# Altium PCB PCB2.pcbdoc
Units mil, origin at the board's own origin, x right, y up, seen from the top; angles counter-clockwise.
Board outline 2704 x 1920 mil, 2 copper layers (Top Layer, Bottom Layer); 35 components, 21 nets, 157 pads, 55 vias.
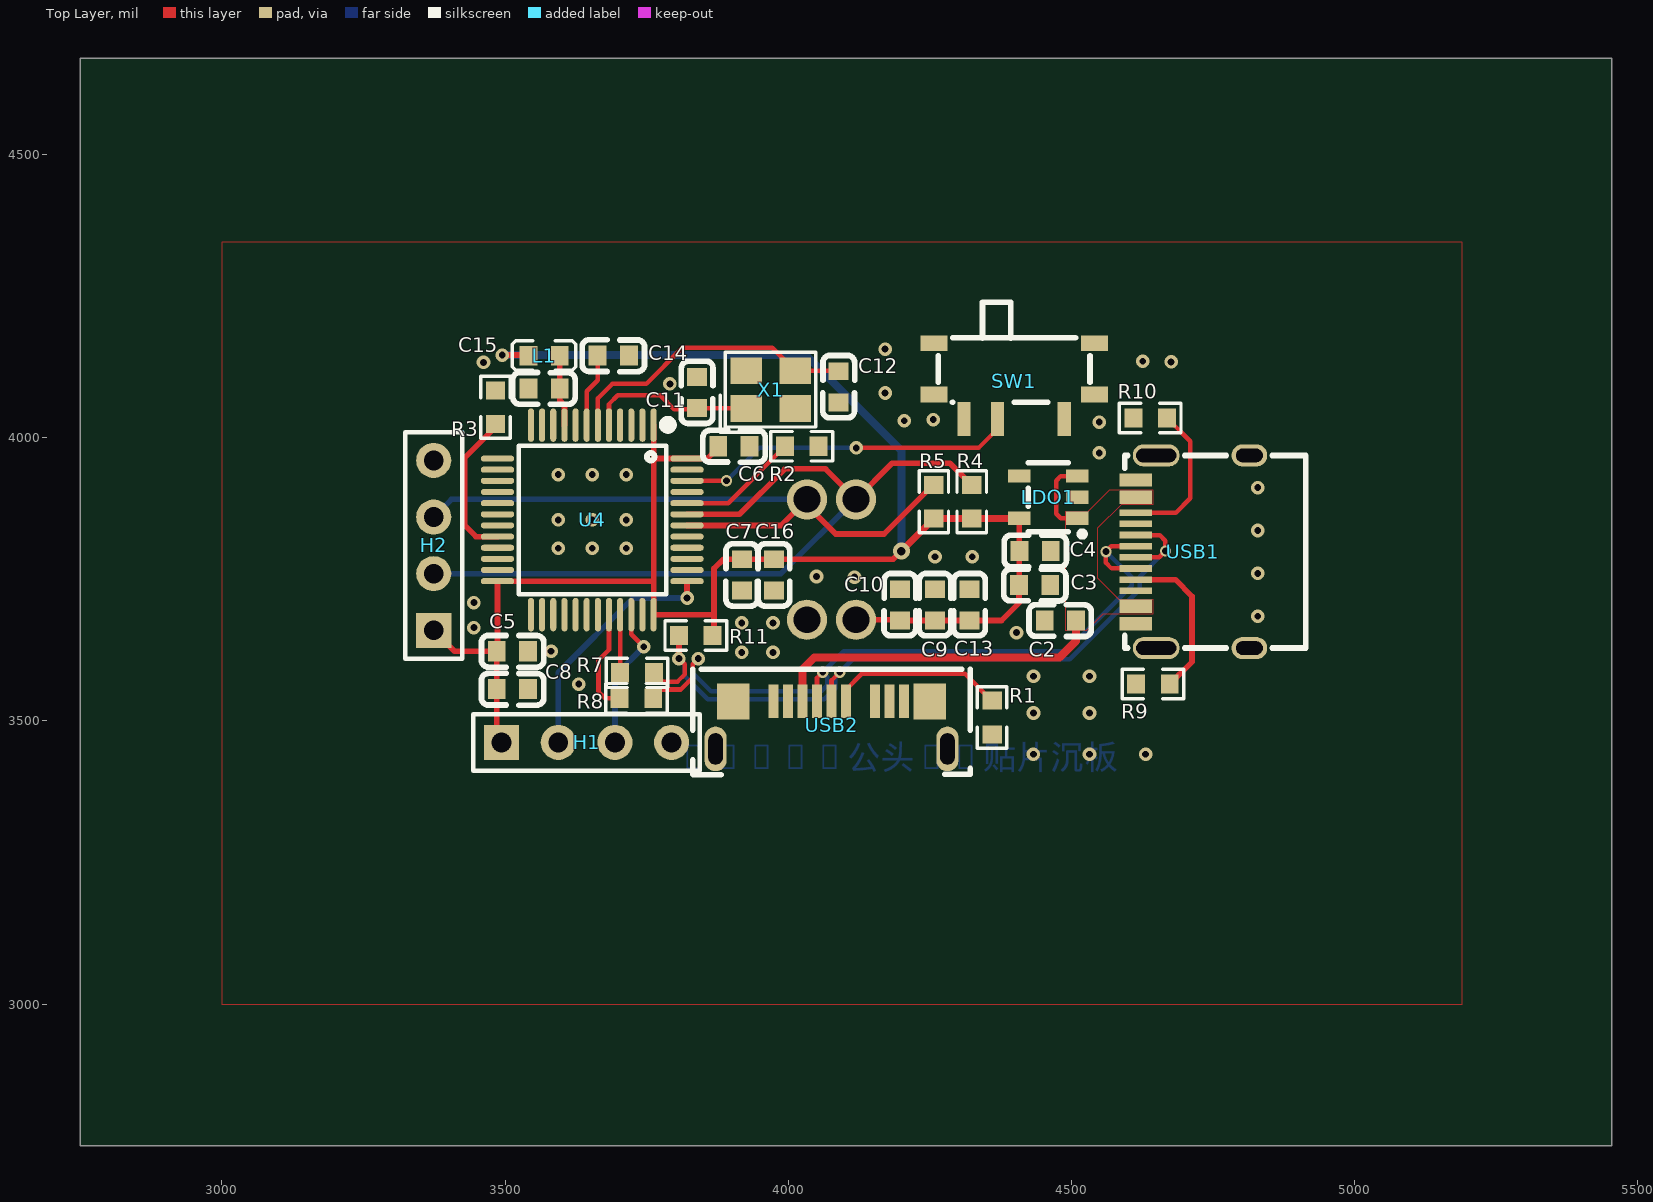
[diagram p0: Top Layer view]
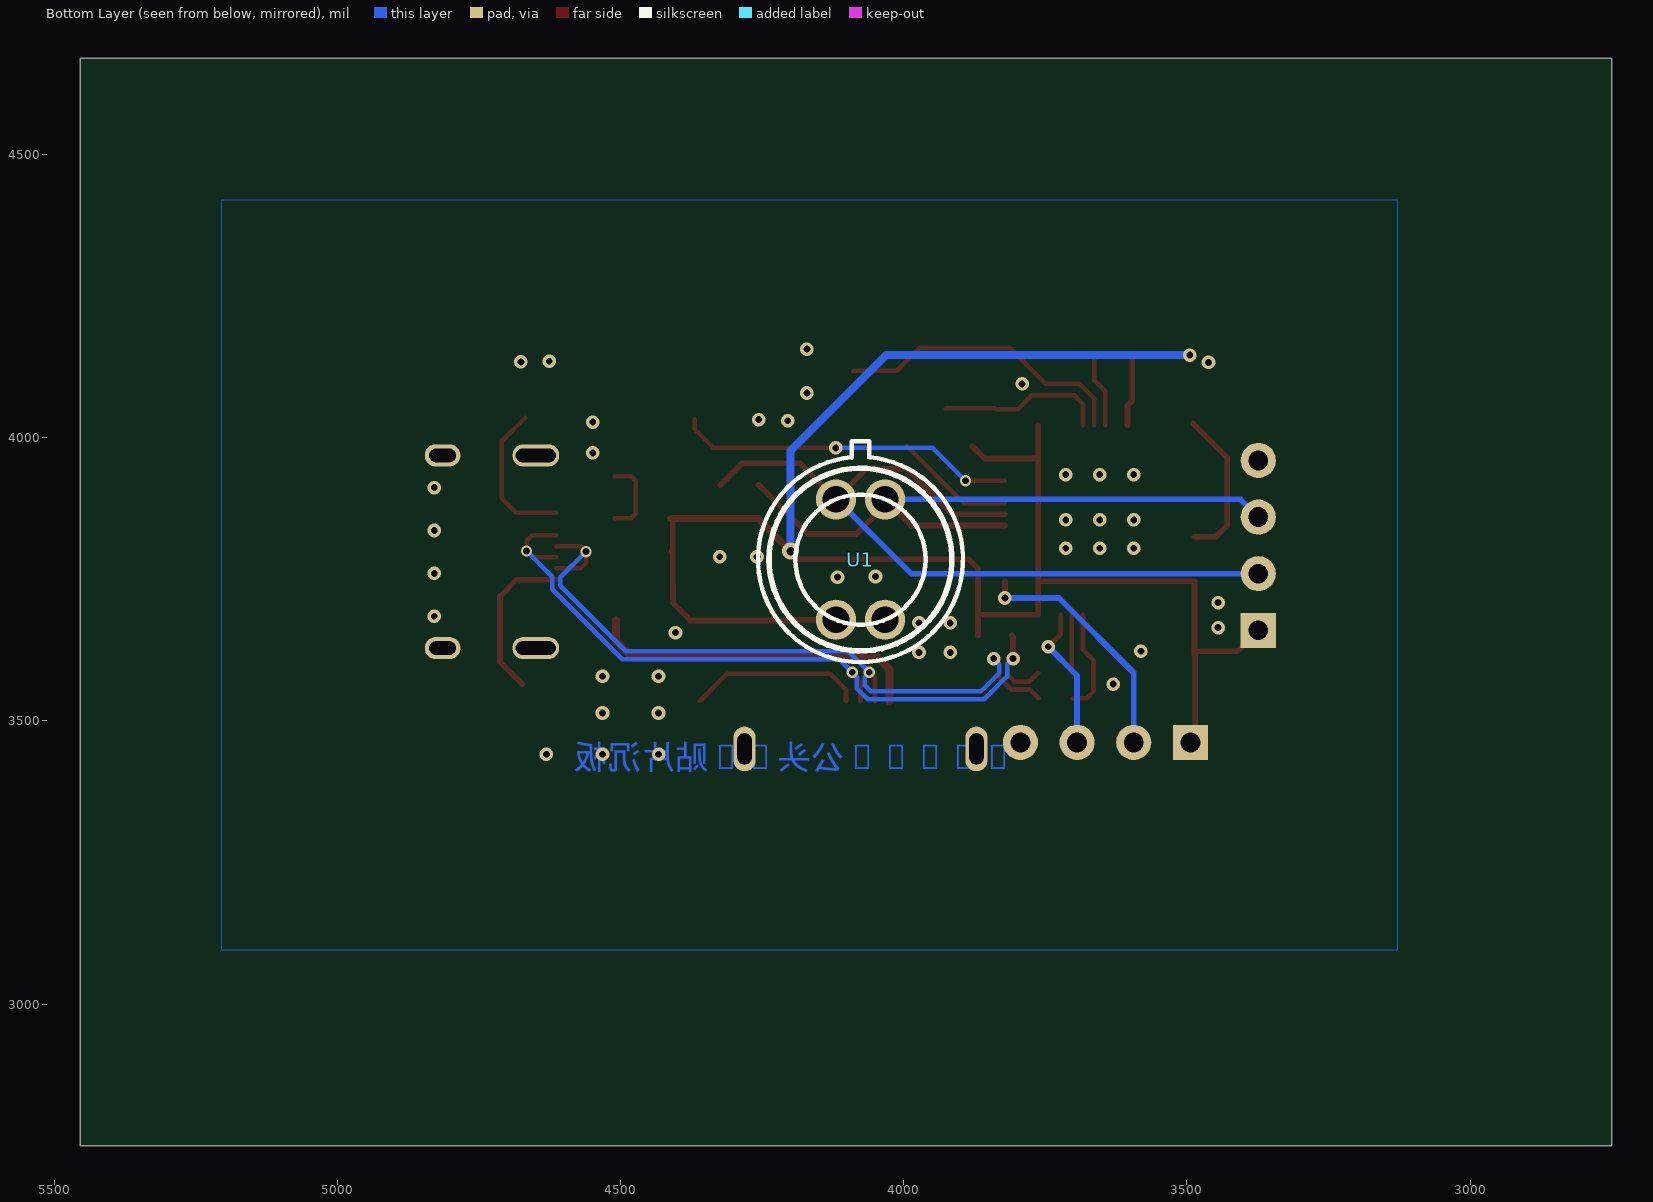
[diagram p1: Bottom Layer view, seen from below]

## Layer stack, top to bottom
Top Solder: solder mask 0.4, Solder Resist, Dk 3.5
Top Layer: signal copper 1.4
Dielectric 1: dielectric 12.6, FR-4, Dk 4.8
Bottom Layer: signal copper 1.4
Bottom Solder: solder mask 0.4, Solder Resist, Dk 3.5

## Board outline
5454,2750 2750,2750 2750,4670 5454,4670

## Design rules (kind name [scope] priority, off if disabled: settings)
AssemblyTestPointUsage [All] p0: scope1count=1 scope1_0_kind=Board scope1_0_value=Board scope2count=1 scope2_0_kind=Board scope2_0_value=Board commentlength=0
AssemblyTestpoint [All] p0: scope1count=1 scope1_0_kind=Board scope1_0_value=Board scope2count=1 scope2_0_kind=Board scope2_0_value=Board commentlength=0
Clearance [All] p0: scope1count=1 scope1_0_kind=Board scope1_0_value=Board scope2count=1 scope2_0_kind=Board scope2_0_value=Board commentlength=0 gap=10
Clearance [All] p1: gap=10 ignorepadtopadclearanceinfootprint=FALSE except(0: Arc-Hole Track-Hole SMDPad-Hole THPad-Hole Via-Hole Fill-Hole Poly-Hole Region-Hole Text-Hole)
ComponentClearance [All] p0: scope1count=1 scope1_0_kind=Board scope1_0_value=Board scope2count=1 scope2_0_kind=Board scope2_0_value=Board commentlength=0 gap=10 collisioncheckmode=3
DiffPairsRouting [All] p0: scope1count=1 scope1_0_kind=Board scope1_0_value=Board scope2count=1 scope2_0_kind=Board scope2_0_value=Board commentlength=0
FabricationTestPointUsage [All] p0: scope1count=1 scope1_0_kind=Board scope1_0_value=Board scope2count=1 scope2_0_kind=Board scope2_0_value=Board commentlength=0 valid=0 allowmultiple=FALSE
FabricationTestpoint [All] p0: scope1count=1 scope1_0_kind=Board scope1_0_value=Board scope2count=1 scope2_0_kind=Board scope2_0_value=Board commentlength=0 side=3 testpointundercomponent=TRUE minsize=40 maxsize=100 preferedsize=60 minholesize=0 maxholesize=40 preferedholesize=32 testpointgrid=1
FanoutControl Fanout_BGA [All] p0 off: scope1count=1 scope1_0_kind=Board scope1_0_value=Board scope2count=1 scope2_0_kind=Board scope2_0_value=Board commentlength=69 // Protel DXP Scope 1 Expression Was: IsBGA   Fanout_BGA (Default Rule)
FanoutControl Fanout_LCC [All] p0 off: scope1count=1 scope1_0_kind=Board scope1_0_value=Board scope2count=1 scope2_0_kind=Board scope2_0_value=Board commentlength=69 // Protel DXP Scope 1 Expression Was: IsLCC   Fanout_LCC (Default Rule)
FanoutControl Fanout_SOIC [All] p0 off: scope1count=1 scope1_0_kind=Board scope1_0_value=Board scope2count=1 scope2_0_kind=Board scope2_0_value=Board commentlength=71 // Protel DXP Scope 1 Expression Was: IsSOIC   Fanout_SOIC (Default Rule)
FanoutControl Fanout_Small [All] p0 off: scope1count=1 scope1_0_kind=Board scope1_0_value=Board scope2count=1 scope2_0_kind=Board scope2_0_value=Board commentlength=84 // Protel DXP Scope 1 Expression Was: (CompPinCount < 5)   Fanout_Small (Default Rule)
FanoutControl Fanout_Default [All] p0: scope1count=1 scope1_0_kind=Board scope1_0_value=Board scope2count=1 scope2_0_kind=Board scope2_0_value=Board commentlength=30 // Fanout_Default (Default Rule)
Height [All] p0: scope1count=1 scope1_0_kind=Board scope1_0_value=Board scope2count=1 scope2_0_kind=Board scope2_0_value=Board commentlength=0
HoleSize [All] p0: scope1count=1 scope1_0_kind=Board scope1_0_value=Board scope2count=1 scope2_0_kind=Board scope2_0_value=Board commentlength=0 absolutevalues=TRUE maxlimit=100 minlimit=1 maxpercent=80.000 minpercent=20.000
HoleToHoleClearance [All] p0: scope1count=1 scope1_0_kind=Board scope1_0_value=Board scope2count=1 scope2_0_kind=Board scope2_0_value=Board commentlength=0
LayerPairs [All] p0: scope1count=1 scope1_0_kind=Board scope1_0_value=Board scope2count=1 scope2_0_kind=Board scope2_0_value=Board commentlength=0 enforce=TRUE
MinimumSolderMaskSliver [All] p0: scope1count=1 scope1_0_kind=Board scope1_0_value=Board scope2count=1 scope2_0_kind=Board scope2_0_value=Board commentlength=0
NetAntennae [All] p0: scope1count=1 scope1_0_kind=Board scope1_0_value=Board scope2count=1 scope2_0_kind=Board scope2_0_value=Board commentlength=0
PasteMaskExpansion [All] p0: scope1count=1 scope1_0_kind=Board scope1_0_value=Board scope2count=1 scope2_0_kind=Board scope2_0_value=Board commentlength=0 expansion=0
PlaneClearance [All] p0: scope1count=1 scope1_0_kind=Board scope1_0_value=Board scope2count=1 scope2_0_kind=Board scope2_0_value=Board commentlength=0 clearance=20
PlaneConnect [All] p0: scope1count=1 scope1_0_kind=Board scope1_0_value=Board scope2count=1 scope2_0_kind=Board scope2_0_value=Board commentlength=0 planeconnectstyle=Relief reliefexpansion=20 reliefentries=4 reliefconductorwidth=10 reliefairgap=10
PolygonConnect [All] p0: scope1count=1 scope1_0_kind=Board scope1_0_value=Board scope2count=1 scope2_0_kind=Board scope2_0_value=Board commentlength=0 connectstyle=Relief reliefconductorwidth=10 reliefentries=4 polygonreliefangle="90 Angle"
PolygonConnect [All] p1: connectstyle=Relief reliefconductorwidth=10 reliefentries=4 polygonreliefangle="90 Angle" airgapwidth=10
RoutingCorners [All] p0: scope1count=1 scope1_0_kind=Board scope1_0_value=Board scope2count=1 scope2_0_kind=Board scope2_0_value=Board commentlength=0 cornerstyle=45-Degree minsetback=100 maxsetback=100
RoutingLayers [All] p0: scope1count=1 scope1_0_kind=Board scope1_0_value=Board scope2count=1 scope2_0_kind=Board scope2_0_value=Board commentlength=0 top layer=Automatic bottom layer=Automatic
RoutingPriority [All] p0: scope1count=1 scope1_0_kind=Board scope1_0_value=Board scope2count=1 scope2_0_kind=Board scope2_0_value=Board commentlength=0
RoutingTopology [All] p0: scope1count=1 scope1_0_kind=Board scope1_0_value=Board scope2count=1 scope2_0_kind=Board scope2_0_value=Board commentlength=0 topology=Shortest
RoutingVias [All] p0: scope1count=1 scope1_0_kind=Board scope1_0_value=Board scope2count=1 scope2_0_kind=Board scope2_0_value=Board commentlength=0 holewidth=28 width=50 viastyle="Through Hole" minholewidth=28 minwidth=50 maxholewidth=28 maxwidth=50
RoutingVias [All] p1: holewidth=28 width=50 viastyle="Through Hole" minholewidth=28 minwidth=50 maxholewidth=28 maxwidth=50
ShortCircuit [All] p0: scope1count=1 scope1_0_kind=Board scope1_0_value=Board scope2count=1 scope2_0_kind=Board scope2_0_value=Board commentlength=0 allowed=FALSE
SilkToBoardRegionClearance [All] p0: scope1count=1 scope1_0_kind=Board scope1_0_value=Board scope2count=1 scope2_0_kind=Board scope2_0_value=Board commentlength=0
SilkToSilkClearance [All] p0: scope1count=1 scope1_0_kind=Board scope1_0_value=Board scope2count=1 scope2_0_kind=Board scope2_0_value=Board commentlength=0
SilkToSolderMaskClearance [All] p0 off: scope1count=1 scope1_0_kind=Board scope1_0_value=Board scope2count=1 scope2_0_kind=Board scope2_0_value=Board commentlength=44 // Protel DXP Scope 1 Expression Was: IsPad
SolderMaskExpansion [All] p0: scope1count=1 scope1_0_kind=Board scope1_0_value=Board scope2count=1 scope2_0_kind=Board scope2_0_value=Board commentlength=0 expansion=4
SolderMaskExpansion [All] p1: expansion=4 istentingtop=FALSE
UnRoutedNet [All] p0: scope1count=1 scope1_0_kind=Board scope1_0_value=Board scope2count=1 scope2_0_kind=Board scope2_0_value=Board commentlength=0
UnpouredPolygon [All] p0: scope1count=1 scope1_0_kind=Board scope1_0_value=Board scope2count=1 scope2_0_kind=Board scope2_0_value=Board commentlength=0
Width [All] p0: scope1count=1 scope1_0_kind=Board scope1_0_value=Board scope2count=1 scope2_0_kind=Board scope2_0_value=Board commentlength=0 maxlimit=10 minlimit=10 preferedwidth=10
Width [All] p1: maxlimit=10 minlimit=10 preferedwidth=10
30 further rules are at their usual default settings.

## Components (designator, comment, footprint, x,y, rotation, side; value= is the part's Value field where it differs from the comment)
C2 "10uF" C0603 4480.44,3677 r0 top
C3 "1uF" C0603 4435,3740 r180 top
C4 "100nF" C0603 4436,3800 r180 top
C5 "100nF" C0603 3513,3623 r180 top
C6 "100nF" C0603 3904,3985 r180 top
C7 "100nF" C0603 3918,3758 r90 top
C8 "100nF" C0603 3513,3556 r180 top
C9 "10uF" C0603 4259,3705 r270 top
C10 "100nF" C0603 4197,3705 r270 top
C11 "22pF" C0603 3839,4080 r270 top
C12 "22pF" C0603 4089,4090 r270 top
C13 "10uF" C0603 4320,3705 r270 top
C14 "100nF" C0603 3691,4145 r180 top
C15 "100nF" C0603 3569,4087 r0 top
C16 "10uF" C0603 3975,3758 r90 top
H1 "HDR-F-2.54_1x4" HDR-F-2.54_1X4 3644,3462 r0 top
H2 "HDR-F-2.54_1x4" HDR-F-2.54_1X4 3374,3810 r90 top
L1 "600R" L0603 3569,4145 r0 top
LDO1 "ME6211C33M5G-N" SOT-23-5_L3.0-W1.7-P0.95-LS2.8-BR 4459,3895 r0 top
R1 "5.1k" R0603 4360,3506 r90 top
R2 "10k" R0603 4024,3985 r0 top
R3 "10k" R0603 3483,4054 r270 top
R4 "4k7" R0603 4324,3887 r270 top
R5 "4k7" R0603 4257,3887 r270 top
R7 "22r" R0603 3733,3585 r0 top
R8 "22r" R0603 3732,3540 r0 top
R9 "5.1k" R0603 4644,3565 r0 top
R10 "5.1k" R0603 4639,4035 r0 top
R11 "1.5K/NC" R0603 3837,3651 r180 top
SW1 "MSK12C02" SW-TH_MSK12C02 4399,4100 r180 top
U1 "MLX90640ESF-BAB-000-TU" TO-39-4_MELEXIS_MLX90640 4076.4,3784.92 r180 bottom
U4 "AT32F403ACGT7" LQFP-48_L7.0-W7.0-P0.50-LS9.0-BL 3654,3855 r180 top
USB1 "TYPEC-304-BCP16" USB-C-SMD_TYPEC-304-BCP16 4714,3798.7 r90 top
USB2 "" ? 4076.39,3491.1 r0 top
X1 "CJ13-120001210B20" CRYSTAL-SMD_4P-L3.2-W2.5-BL 3969,4085 r0 top

## Footprints (in the part's own frame and the unit in brackets; to place one, negate y for a bottom-side part, rotate by r counter-clockwise, add the part's x,y. Pads: shape width x height; smd on the part's side, far side on the other; paste and mask are expansions set on the pad)
C0603 [mm]
  rect 0.8x0.9 smd mask+0: 1(-0.7,0) 2(0.7,0)
  silkscreen extent -1.41,-0.71 1.39,0.72
CRYSTAL-SMD_4P-L3.2-W2.5-BL [mm]
  rect 1.4x1.2 smd mask+0: 1(-1.1,-0.85) 2(1.1,-0.85) 3(1.1,0.85) 4(-1.1,0.85)
  silkscreen extent -2.26,-1.91 2.03,1.68
HDR-F-2.54_1X4 [mil]
  rect 62x62 hole 35 mask+0: 1(-150,0)
  round 62 hole 35 mask+0: 2(-50,0) 3(50,0) 4(150,0)
  silkscreen extent -200,-50 200,50
L0603 [mm]
  rect 0.8x0.864 smd mask+0: 1(-0.7,0) 2(0.7,0)
  silkscreen extent -1.42,-0.65 1.41,0.67
LQFP-48_L7.0-W7.0-P0.50-LS9.0-BL [mm]
  oval 0.27x1.5 smd mask+0: 1(-2.75,-4.25) 2(-2.25,-4.25) 3(-1.75,-4.25) 4(-1.25,-4.25) 5(-0.75,-4.25) 6(-0.25,-4.25) 7(0.25,-4.25) 8(0.75,-4.25) 9(1.25,-4.25) 10(1.75,-4.25) 11(2.25,-4.25) 12(2.75,-4.25) 25(2.75,4.25) 26(2.25,4.25) 27(1.75,4.25) 28(1.25,4.25) 29(0.75,4.25) 30(0.25,4.25) 31(-0.25,4.25) 32(-0.75,4.25) 33(-1.25,4.25) 34(-1.75,4.25) 35(-2.25,4.25) 36(-2.75,4.25)
  oval 1.5x0.27 smd mask+0: 13(4.25,-2.75) 14(4.25,-2.25) 15(4.25,-1.75) 16(4.25,-1.25) 17(4.25,-0.75) 18(4.25,-0.25) 19(4.25,0.25) 20(4.25,0.75) 21(4.25,1.25) 22(4.25,1.75) 23(4.25,2.25) 24(4.25,2.75) 37(-4.25,2.75) 38(-4.25,2.25) 39(-4.25,1.75) 40(-4.25,1.25) 41(-4.25,0.75) 42(-4.25,0.25) 43(-4.25,-0.25) 44(-4.25,-0.75) 45(-4.25,-1.25) 46(-4.25,-1.75) 47(-4.25,-2.25) 48(-4.25,-2.75)
  silkscreen extent -3.59,-4.46 3.3,3.34
R0603 [mil]
  rect 31.75x34.02 smd mask+0: 1(-29.66,0) 2(29.66,0)
  silkscreen extent -55,-26 55,26
SOT-23-5_L3.0-W1.7-P0.95-LS2.8-BR [mm]
  rect 1x0.6 smd mask+0: 1(1.3,-0.95) 2(1.3,0) 3(1.3,0.95) 4(-1.3,0.95) 5(-1.3,-0.95)
  silkscreen extent -0.9,-1.78 1.65,1.55
SW-TH_MSK12C02 [mm]
  rect 0.6x1.524 smd mask+0: 1(-2.25,1.7) 2(0.75,1.7) 3(2.25,1.7)
  rect 1.2x0.7 smd mask+0: 4(3.6,0.6) 5(3.6,-1.7) 6(-3.6,-1.7) 7(-3.6,0.6)
  silkscreen extent -3.4,-3.53 3.4,0.95
TO-39-4_MELEXIS_MLX90640 [mm]
  round 1.8 hole 1.2 copper offset 0,-0.001 mask+0: 1(-1.1,2.701) 2(-1.1,-2.699) 3(1.1,-2.699) 4(1.1,2.701)
  silkscreen extent -4.6,-4.6 4.6,5.3
USB-C-SMD_TYPEC-304-BCP16 [mm]
  oval 1x2.1 hole 0.6 slot 1.8 at 90 deg mask+0: 13(-4.32,1.633) 14(4.32,1.633)
  oval 1x1.6 hole 0.6 slot 1.2 at 90 deg mask+0: 15(-4.32,-2.547) 16(4.32,-2.547)
  rect 0.6x1.45 smd mask+0: A1B12(-3.225,2.547) A4B9(-2.45,2.547) B1A12(3.22,2.547) B4A9(2.45,2.547)
  rect 0.3x1.45 smd mask+0: A5(-1.25,2.547) A6(-0.25,2.547) A7(0.25,2.547) A8(1.25,2.547) B5(1.75,2.547) B6(0.75,2.547) B7(-0.75,2.547) B8(-1.75,2.547)
  silkscreen extent -4.32,-5.08 4.32,3.05
? [mm]
  rect 0.45x1.5 smd mask+0: A1(3.25,1.1) A2(2.6,1.1) A3(1.95,1.1) A5(0.65,1.1) A6(0,1.1) A7(-0.65,1.1) A9(-1.3,1.1) B10(-2.6,1.1) B11(-1.95,1.1)
  rect 1.45x1.6 smd mask+0: GND1(4.4,1.1) GND2(-4.4,1.1)
  oval 1x2 hole 0.65 slot 1.4 at 90 deg copper offset 0,0 mask+0: GND3(5.201,-1.03) GND4(-5.2,-1.03)
  silkscreen extent -6.22,-2.19 6.22,2.54

## Via types
v1: diameter 24.02, hole 12.01, Top Layer to Bottom Layer, 49 vias
v2: diameter 20, hole 12.01, Top Layer to Bottom Layer, 5 vias
v3: diameter 30, hole 15, Top Layer to Bottom Layer, 1 vias

## Nets (pads, with @x,y where several pads share a name; then routed paths per layer and width w, separated by ;. In a path a pad name is that pad's centre, name@x,y a point inside that pad or via, vN(x,y) a via of type N, cw(c..) or ccw(c..) an arc to the next point about the centre after c; other vN are vias at no path point)
3V3: C3.2 C4.2 C5.2 C6.2 C7.2 C8.2 C9.2 C10.2 C13.2 C16.2 H1.1 H2.1 L1.1 LDO1.5 R4.2 R5.2 R11.1 U1.2 U4.1 U4.24 U4.36 U4.48 | length 3416.1
  Top Layer w10: H2.1 3411,3623 C5.2 C5.2@3485.44,3617.56 ; C5.2@3487,3617.68 C5.2@3486.68,3618 ; H1.1 3485.44,3470.56 C8.2 C5.2@3485.44,3617.56 ; v1(3495,4146) 3540.45,4146 L1.1 ; 3762.25,3746.73 U4.24 C5.2@3486.68,3618 ; U4.1 3762.27,3963.27 ; R11.1@3868.66,3651 3869,3651.34 3869,3687.95 ; C6.2@3879,3985 3857.27,3963.27 U4.48 3762.27,3963.27 ; U1.2@4119.71,3678.62 4195.82,3678.62 C10.2 C9.2 C13.2 4376.44,3677.44 4407.44,3708.44 C3.2 4407.81,3740.38 C4.2@4407.81,3802.62 ; v3(4199.66,3800) 4185.22,3785.56 3988,3785.56 3921,3785.56 3885.56,3785.56 3869,3769 3869,3687.95 ; C4.2@4410.44,3800 C4.2@4407.81,3802.62 ; LDO1.5@4412.81,3857.6 LDO1.5 C4.2@4407.81,3802.62 ; C5.2@3485.44,3617.56 C5.2@3486.68,3618 ; 3762.27,3963.27 U4.36 3868.73,3687.68 3869,3687.95
  Top Layer w12: v3(4199.66,3800) R5.2 R4.2 4407.56,3857.34 LDO1.5
  Bottom Layer w14: v1(3495,4146) 4031,4146 4199.66,3977.34 v3(4199.66,3800)
$1N463: R9.2 USB1.A5 | length 282.8
  Top Layer w10: USB1.A5 4683.51,3749.49 4713,3720 4713,3604.34 R9.2
$1N467: R10.2 USB1.B5 | length 265.9
  Top Layer w8: USB1.B5 4684.6,3867.6 4710,3893 4710,3993.66 R10.2
$1N6489: C11.2 U4.5 X1.1 | length 297.5
  Top Layer w8: U4.5 3683.53,4059.53 3699,4075 3774,4075 3799,4050 3836.56,4050 C11.2 3924.78,4052.44 X1.1
$1N6590: C12.1 U4.6 X1.3 | length 526.8
  Top Layer w8: U4.6 3664,4022.48 3664,4070 3689,4095 3749,4095 3813,4159 3971.78,4159 X1.3 4088.09,4118.47 C12.1
$1N6961: R7.1 U4.33 | length 102.7
  Top Layer w8: U4.33 3703.21,3585.13 R7.1
$1N7058: R8.1 U4.32 | length 185.7
  Top Layer w8: U4.32 3683.53,3625.53 3665,3607 3665,3552 3677,3540 R8.1
$1N8275: C14.2 U4.7 | length 130.8
  Top Layer w8: U4.7 3644,4022.48 3644,4082 3663.44,4101.44 C14.2
$1N9429: R2.1 U4.44 | length 214.6
  Top Layer w8: U4.44 3893.87,3884.53 R2.1
$1N9837: R3.2 U4.20 | length 271
  Top Layer w10: U4.20 3448.53,3825.47 3429,3845 3429,3965.34 R3.2@3489,4025.34
$1N12615: C15.2 L1.2 U4.9 | length 126.3
  Top Layer w10: L1.2 C15.2 3596.56,4065.44 3605,4057 3605,4022.53 U4.9
$1N16562: R1.2 USB2.A5 | length 309.9
  Top Layer w8: USB2.A5 4101.98,3555.08 4129.91,3583 4312,3583 4359.34,3535.66 R1.2
DN: R8.2 USB1.A7 USB1.B7 USB2.A7 | length 1311.4
  Top Layer w8: R8.2 3777.16,3555.5 3810.3,3555.5 3831,3576.2 3831,3600 v1(3841.01,3610.01) ; USB2.A7 4050.8,3575.8 v2(4061,3586) ; USB1.B7 4570.82,3769.18 4561,3779 v2(4561,3799) 4570.55,3808.55 USB1.A7
  Bottom Layer w8: v1(3841.01,3610.01) 3831,3600 3831,3585 3864,3552 4058,3552 4069,3563 4069,3578 v2(4061,3586) 4061.5,3586 4062,3586.5 4062,3586.7 4098.3,3623 4491,3623 4606.5,3738.5 4606.5,3753.5 v2(4561,3799)
DP: R7.2 R11.2 USB1.A6 USB1.B6 USB2.A6 | length 1363.6
  Top Layer w8: R7.2 3778.16,3569.5 3804.5,3569.5 3817,3582 3817,3600 v1(3806.99,3610.01) ; USB2.A6 4076.39,3571.39 v2(4091,3586) ; USB1.A6 4613.85,3789 4655,3789 v2(4666,3800) 4666,3818 4655.77,3828.23 USB1.B6
  Top Layer w10: v1(3806.99,3610.01) 3807,3648.66 R11.2@3809.34,3651
  Bottom Layer w8: v1(3806.99,3610.01) 3817,3600 3817,3579.2 3858.2,3538 4063.8,3538 4083,3557.2 4083,3578 v2(4091,3586) 4114,3609 4496.8,3609 4620.5,3732.7 4620.5,3754.5 v2(4666,3800)
GND: C2.1 C3.1 C4.1 C5.1 C6.1 C7.1 C8.1 C9.1 C10.1 C11.1 C12.2 C13.1 C14.1 C15.1 C16.1 H1.4 H2.4 LDO1.2 R1.1 R2.2 R3.1 R9.1 R10.1 SW1.3 SW1.4 SW1.5 SW1.6 SW1.7 U1.3 U4.8 U4.23 U4.35 U4.47 USB1.13 USB1.14 USB1.15 USB1.16 USB1.A1B12 USB1.B1A12 USB2.A1 USB2.GND1 USB2.GND2 USB2.GND3 USB2.GND4 X1.2 X1.4
  other v1: 4432.9,3441 4531.95,3441 4631,3441 4433,3514 4531.95,3514 3630,3565 4433,3579 4532,3579 3918,3621 3973.08,3621.07 3581.38,3623 4403,3656 3445,3664.86 3918,3673 3973.08,3673 4829,3684.85 3445,3709 4117,3754 4050,3755 4829,3760.56 4259.11,3789.76 4325,3790 3594,3805 3654,3805 3714,3805 4829,3836.28 3594,3855 3654,3855 3714,3855 4829,3912 3594,3935 3654,3935 3714,3935 4549,3973.3 4549,4027.7 4205,4030 4256,4032 4171,4079 3791,4095 3462,4133 4676,4134 4626,4135 4171,4156.47
IR_SCL: H2.3 R5.1 U1.4 U4.42 | length 1194.1
  Top Layer w10: U4.42 3987.03,3845.16 U1.4 4033.09,3880.91 4084,3830 4169,3830 4255.66,3916.66 R5.1
  Bottom Layer w10: H2.3 3405.22,3891.22 U1.4
IR_SDA: H2.2 R4.1 U1.1 U4.43 | length 1400.5
  Top Layer w10: U4.43 3913.84,3864.84 3994,3945 4065.93,3945 U1.1 4183.49,3955 4285.66,3955 R4.1
  Bottom Layer w10: H2.2 3987,3760 4118.22,3891.22 U1.1
SWCLK: H1.2 U4.37 | length 435
  Top Layer w10: U4.37 3821.32,3717.18 v1(3821.5,3717)
  Bottom Layer w10: H1.2 3594,3585 3726,3717 v1(3821.5,3717)
SWDIO: H1.3 U4.34 | length 256
  Top Layer w8: U4.34 3722.9,3653.1 v1(3745,3631)
  Bottom Layer w10: H1.3 3694,3580 v1(3745,3631)
SWITCH: SW1.2 U4.46 | length 603.7
  Top Layer w8: U4.46 3821.42,3924 v2(3891,3924) ; v1(4120,3982) 4336,3982 4369.47,4015.47 SW1.2
  Bottom Layer w8: v2(3891,3924) 3949,3982 v1(4120,3982)
VBUS: C2.2 LDO1.1 LDO1.3 USB1.A4B9 USB1.B4A9 USB2.A9 | length 735.6
  Top Layer w8: LDO1.1 4509.78,3858 4481,3858 4473,3866 4473,3924 4481.4,3932.4 LDO1.3
  Top Layer w14: USB2.A9 4025.21,3591.21 4046,3612 4479,3612 4508,3641 C2.2
pads on no net: LDO1.4 SW1.1 U4.2 U4.3 U4.4 U4.10 U4.11 U4.12 U4.13 U4.14 U4.15 U4.16 U4.17 U4.18 U4.19 U4.21 U4.22 U4.25 U4.26 U4.27 U4.28 U4.29 U4.30 U4.31 U4.38 U4.39 U4.40 U4.41 U4.45 USB1.A8 USB1.B8 USB2.A2 USB2.A3 USB2.B10 USB2.B11

## Polygon pours and split planes (outlines as drawn)
GND on Top Layer "Top Layer-GND" (solid, remove dead copper, pour order 1): 3000,3000 5190,3000 5190,4345 3000,4345
VBUS on Top Layer "Top Layer-VBUS" (solid, remove dead copper, pour order 0): 4644,3908 4644,3882 4588,3882 4546,3840 4546,3753 4584,3715 4644,3715 4644,3688 4555,3688 4526,3659 4490,3659 4490,3870 4530,3870 4568,3908
GND on Bottom Layer "Bottom Layer-GND" (solid, remove dead copper, pour order 2): 3129,3095 5204,3095 5204,4420 3129,4420

## Silkscreen, mask and mechanical layers (free items; w line width, h text height)
Mechanical 1:
  circle w1: c3387.43,4093.98 r59.06
  circle w1: c3387.43,3503.43 r59.06
  circle w1: c4765.38,4093.98 r59.06
  circle w1: c4765.38,3503.43 r59.06
  lines w10: 3289,3405 4863.8,3405 4863.8,4192.4 3289,4192.4 3289,3405

## Text inside footprints (layer, text, board x,y; h text height)
SW1: Bottom Layer "TYPEC公头9P贴片沉板" at 3803.42,3414.99 h43.81